# Altium PCB SubSystems Development Board.PcbDoc
Units mil, origin at the board's own origin, x right, y up, seen from the top; angles counter-clockwise.
Board outline 3937.01 x 3937.01 mil, 4 copper layers (Component Side, Ground Plane, Power Plane, Solder Side), stack 60.234 mil thick; 106 components, 86 nets, 399 pads, 249 vias.
Unrouted connection lines stored in the file: 5.
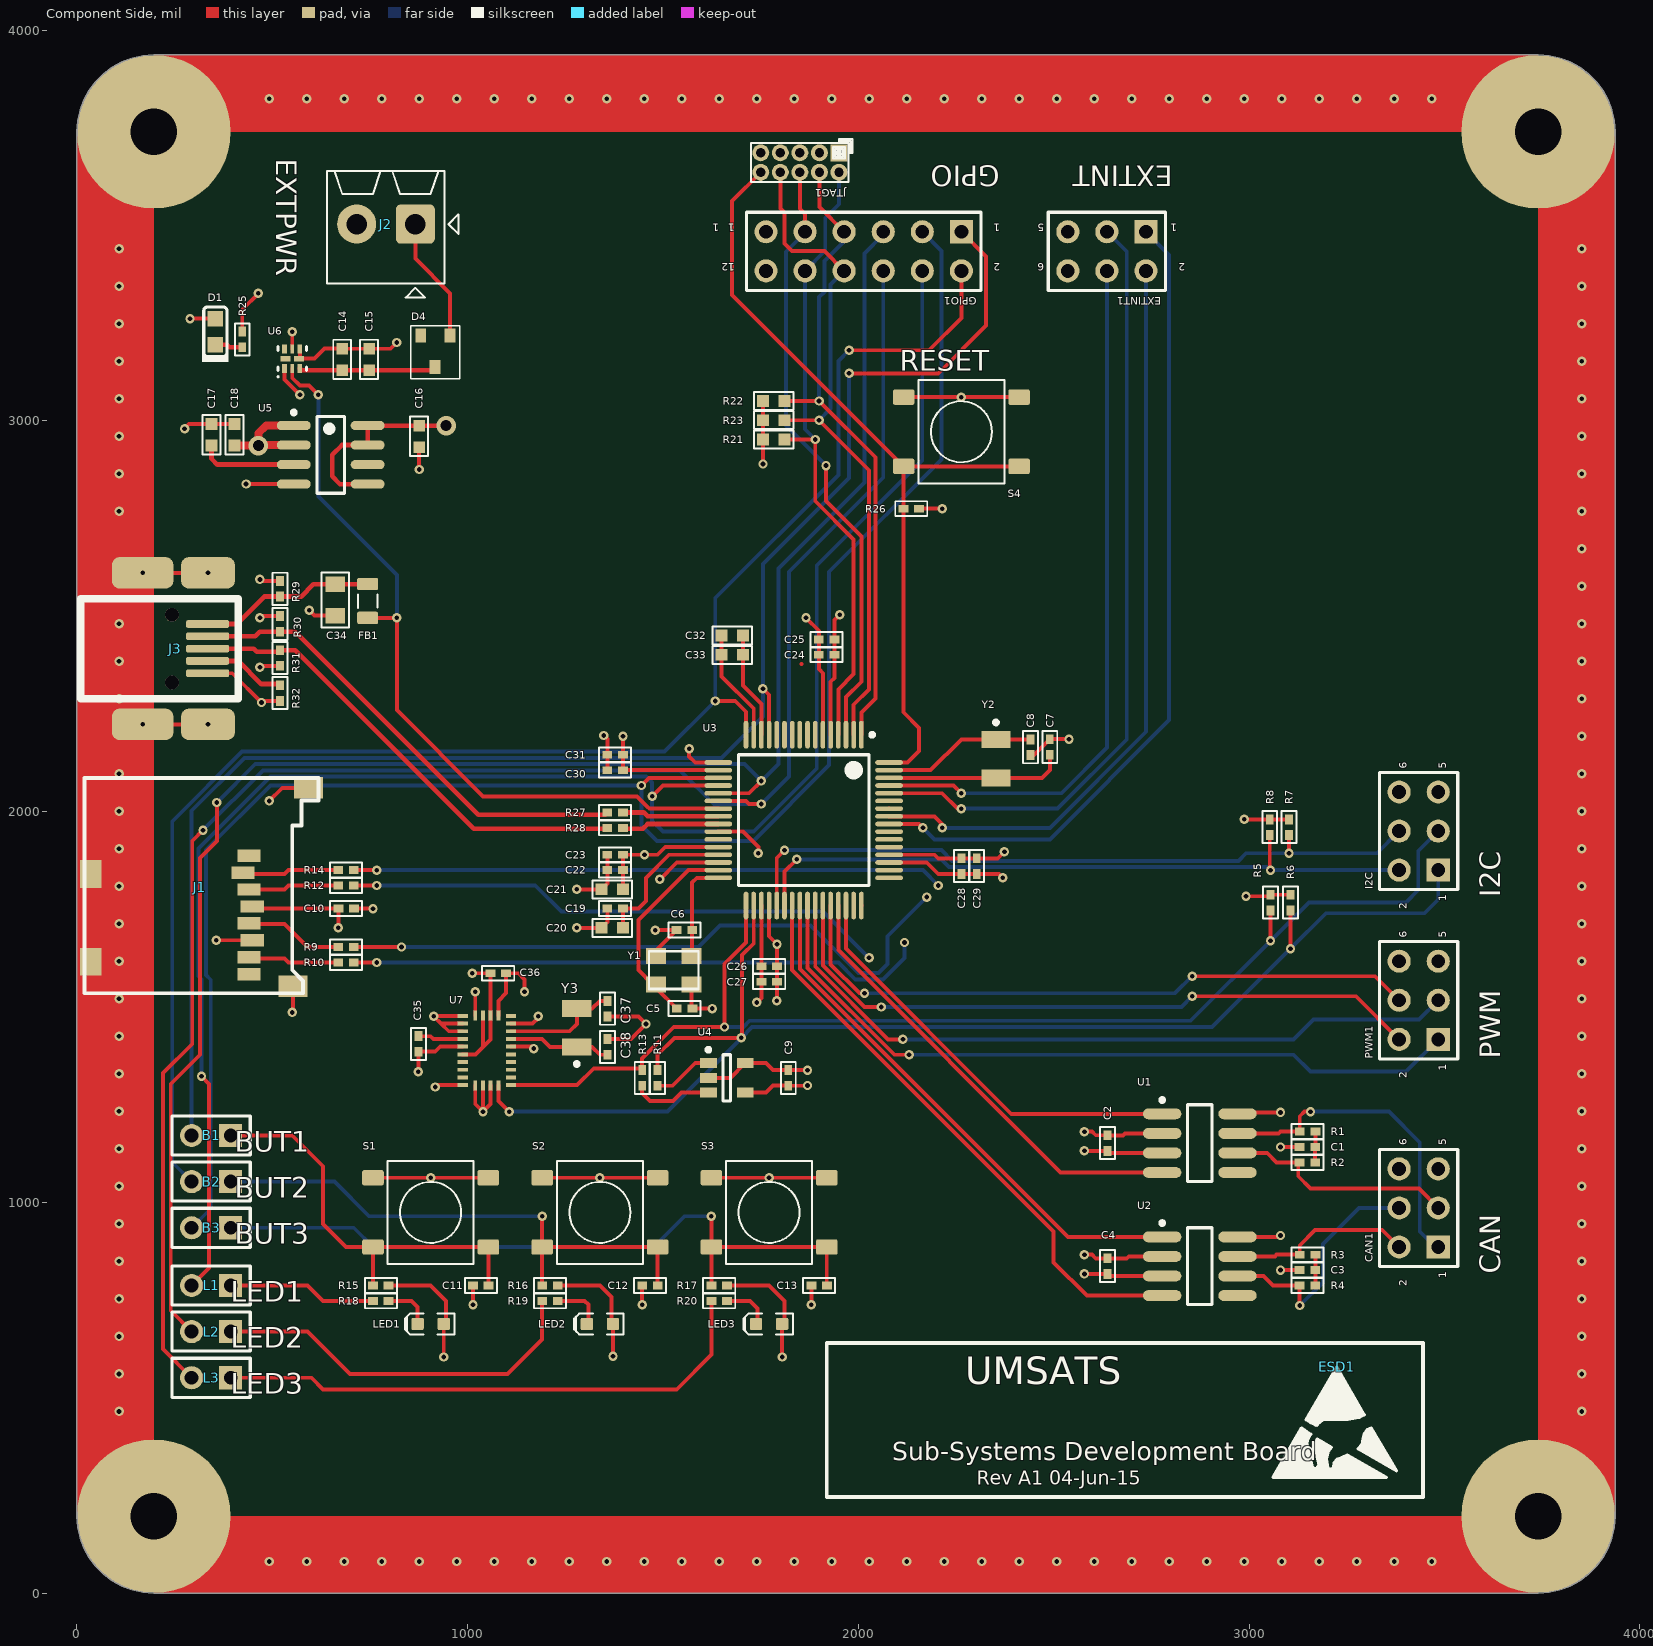
[diagram p0: Component Side view]
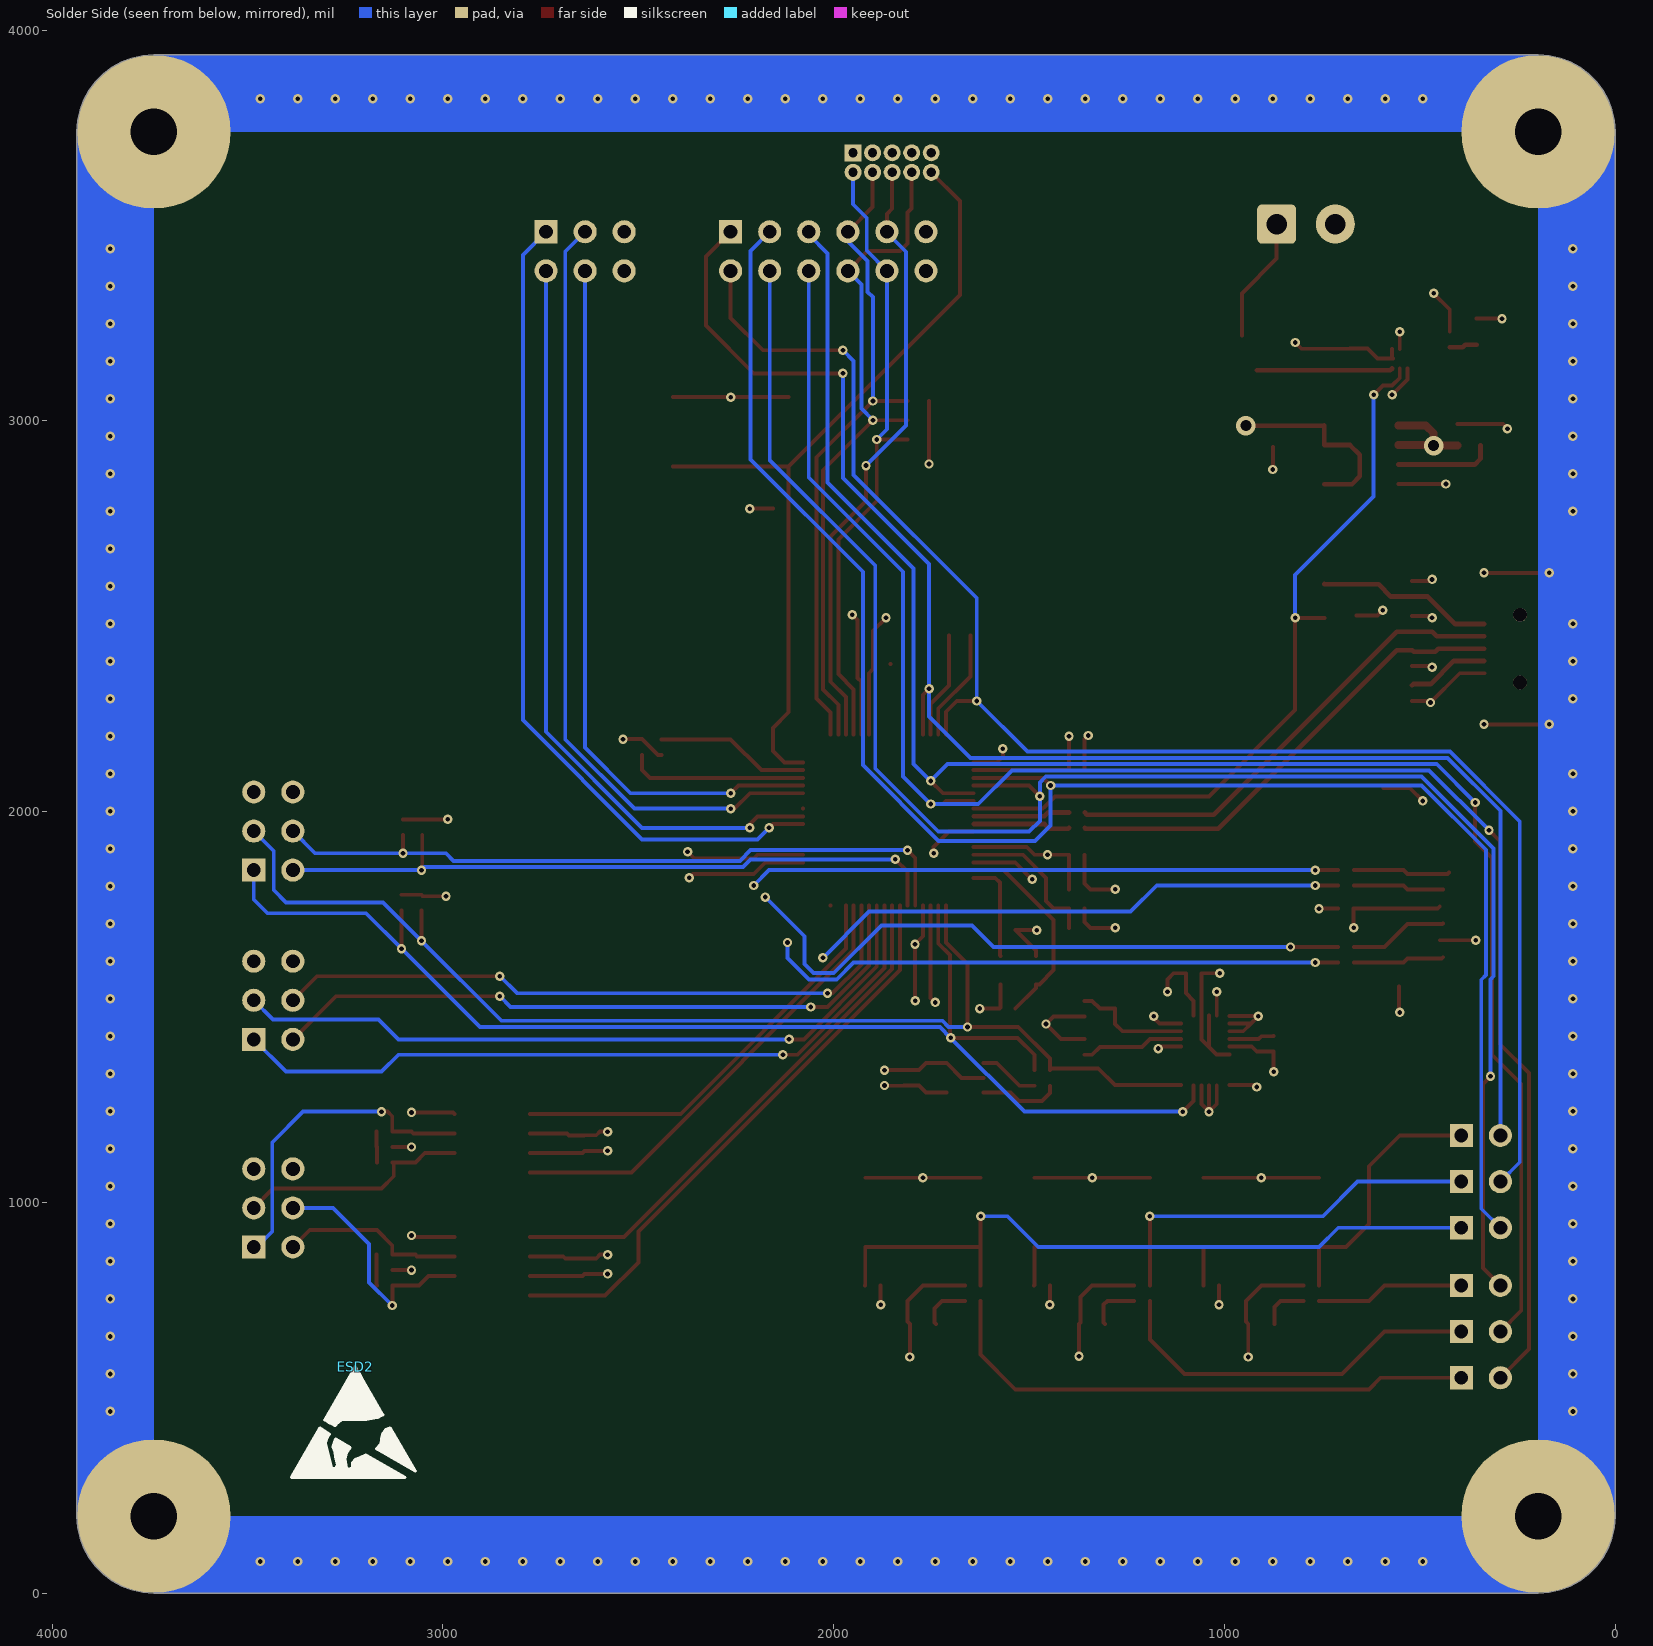
[diagram p1: Solder Side view, seen from below]
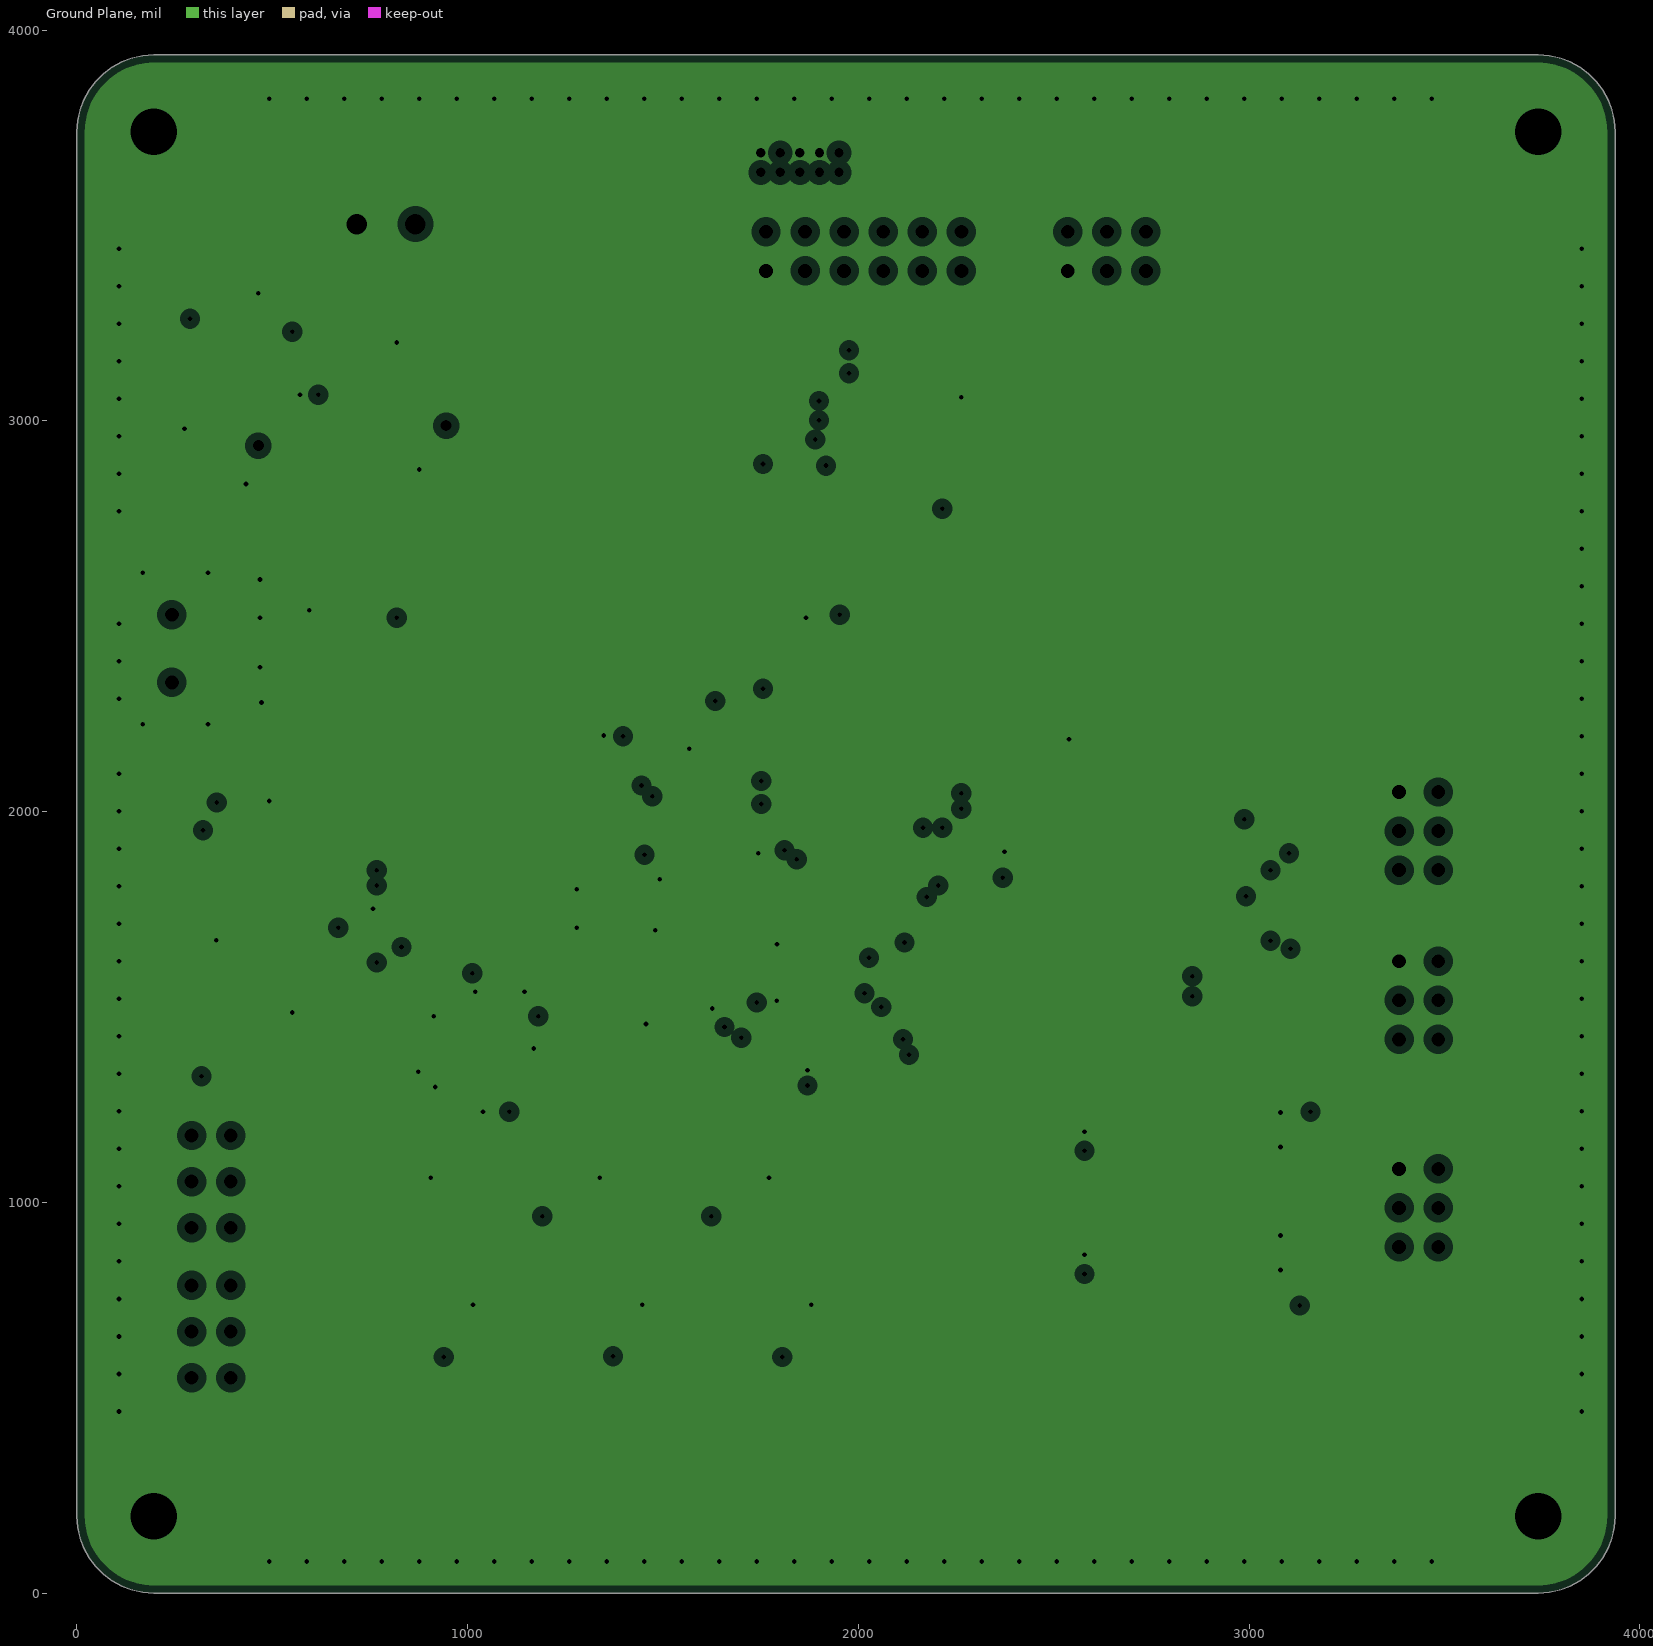
[diagram p2: Ground Plane, clearances drawn from the general rule]
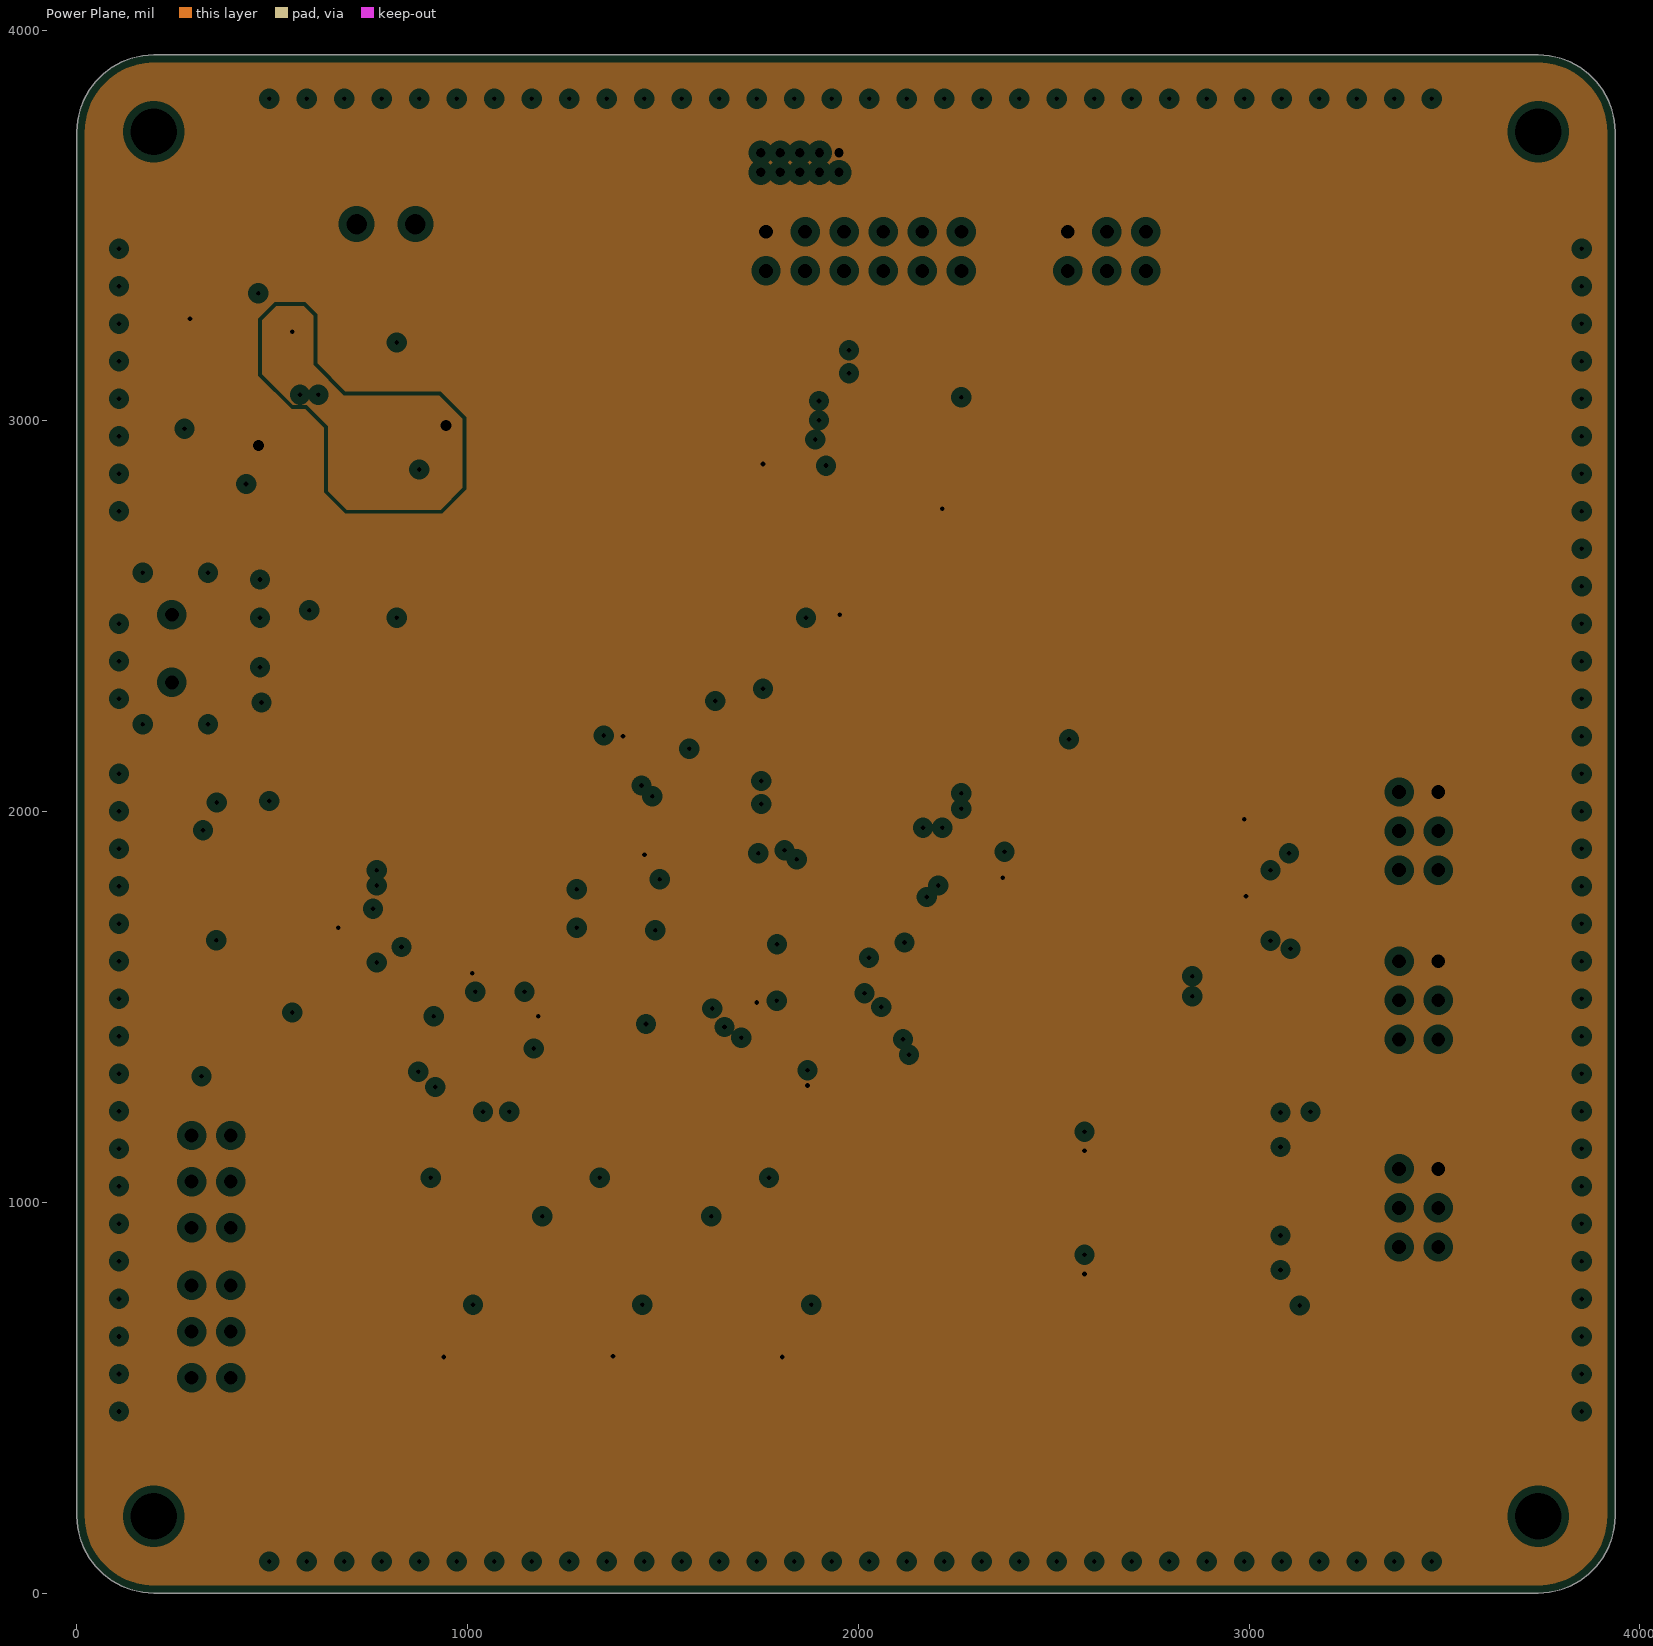
[diagram p3: Power Plane, clearances drawn from the general rule]

## Layer stack, top to bottom
Top Solder: solder mask 0.4, Solder Resist, Dk 3.5
Component Side: signal copper 1.4
Dielectric 1: core 12.6, FR-4, Dk 4.8
Ground Plane: plane copper 1.417, net GND
Dielectric 3: prepreg 32, Dk 4.2
Power Plane: plane copper 1.417, net VMAIN
Dielectric 4: core 10, Dk 4.2
Solder Side: signal copper 1.4
Bottom Solder: solder mask 0.4, Solder Resist, Dk 3.5

## Board outline
196.85,0 3740.16,0 3768.17,2 3795.62,7.97 3821.93,17.79 3846.58,31.25 3869.07,48.08 3888.93,67.94 3905.76,90.42 3919.22,115.08 3929.03,141.39 3935,168.84 3937.01,196.85 3937.01,3740.16 3935,3768.17 3929.03,3795.62 3919.22,3821.93 3905.76,3846.58 3888.93,3869.07 3869.07,3888.93 3846.58,3905.76 3821.93,3919.22 3795.62,3929.03 3768.17,3935 3740.16,3937.01 196.85,3937.01 168.84,3935 141.39,3929.03 115.08,3919.22 90.42,3905.76 67.94,3888.93 48.08,3869.07 31.25,3846.58 17.79,3821.93 7.97,3795.62 2,3768.17 0,3740.16 0,196.85 2,168.84 7.97,141.39 17.79,115.08 31.25,90.42 48.08,67.94 67.94,48.08 90.42,31.25 115.08,17.79 141.39,7.97 168.84,2

## Design rules (kind name [scope] priority, off if disabled: settings)
Clearance [All] p1: gap=6 ignorepadtopadclearanceinfootprint=FALSE except(0: Arc-Hole Track-Hole SMDPad-Hole THPad-Hole Via-Hole Fill-Hole Poly-Hole Region-Hole Text-Hole)
ComponentClearance [All] p1 off: gap=4 collisioncheckmode=3 verticalgap=4 showdistances=FALSE
PlaneClearance [All] p1: clearance=20
PlaneConnect [All] p1: planeconnectstyle=Direct reliefexpansion=20 reliefentries=2 reliefconductorwidth=10 reliefairgap=10
PolygonConnect [All] p1: connectstyle=Relief reliefconductorwidth=10 reliefentries=4 polygonreliefangle="90 Angle" airgapwidth=10
RoutingLayers [All] p1: top layer_v5=FALSE bottom layer_v5=FALSE
RoutingVias [All] p1: holewidth=28 width=50 viastyle="Through Hole" minholewidth=28 minwidth=50 maxholewidth=28 maxwidth=50
SolderMaskExpansion [All] p1: expansion=4
Width [All] p1: maxlimit=50 minlimit=6 preferedwidth=10
26 further rules are at their usual default settings.

## Classes and differential pairs
component class USB: C32 C33 C34 FB1 J3 R26 R27 R28 R29 R30 R31 R32 S4
component class Power: C14 C15 C16 C17 C18 C19 C20 C21 C22 C23 C24 C25 C26 C27 C28 C29 C30 C31 D1 D4 J2 R25 U5 U6
component class PINS: CAN1 ESD1 ESD2 EXTINT1 GPIO1 I2C JTAG1 PWM1 R21 R22 R23
component class PERIPHERALS: B1 B2 B3 C9 C10 C11 C12 C13 C35 C36 C37 C38 J1 L1 L2 L3 LED1 LED2 LED3 R9 R10 R11 R12 R13 R14 R15 R16 R17 R18 R19 R20 S1 S2 S3 U4 U7 Y3
component class MCU: R5 R6 R7 R8 U3
component class "MCU Support": C5 C6 C7 C8 Y1 Y2
component class CAN: C1 C2 C3 C4 R1 R2 R3 R4 U1 U2

## Components (designator, comment, footprint, x,y, rotation, side; value= is the part's Value field where it differs from the comment)
B1 "Button 1 EN" HDR1X2 393.7,1171.26 r180 top
B2 "Button 2 EN" HDR1X2 393.7,1053.15 r180 top
B3 "Button 3 EN" HDR1X2 393.7,935.04 r180 top
C1 "Cap Semi" 0402C-TBD 3169.29,1141.73 r180 top
C2 "Cap Semi" 0402C-TBD 2637.8,1131.89 r90 top
C3 "Cap Semi" 0402C-TBD 3169.29,826.77 r180 top
C4 "Cap Semi" 0402C-TBD 2637.8,816.93 r90 top
C5 "Cap Semi" 0402C-TBD 1535.43,1496.06 r0 top
C6 "Cap Semi" 0402C-TBD 1574.8,1696.85 r180 top
C7 "Cap Semi" 0402C-TBD 2490.16,2145.67 r90 top
C8 "Cap Semi" 0402C-TBD 2440.94,2185.04 r270 top
C9 "Cap Semi" 0402C-TBD 1820.87,1338.58 r270 top
C10 "Cap Semi" 0402C-TBD 669.29,1751.97 r0 top
C11 "Cap Semi" 0402C-TBD 1013.78,787.4 r0 top
C12 "Cap Semi" 0402C-TBD 1446.85,787.4 r0 top
C13 "Cap Semi" 0402C-TBD 1879.92,787.4 r0 top
C14 "Cap Semi" 0603C-TBD 679.13,3129.92 r90 top
C15 "Cap Semi" 0603C-TBD 748.03,3129.92 r90 top
C16 "Cap Semi" 0603C-TBD 875.98,2933.07 r90 top
C17 "Cap Semi" 0603C-TBD 344.49,2992.13 r270 top
C18 "Cap Semi" 0603C-TBD 403.54,2992.13 r270 top
C19 "Cap Semi" 0402C-GENERIC 1397.64,1751.97 r180 top
C20 "Cap Semi" 0603C-TBD 1397.64,1702.76 r180 top
C21 "Cap Semi" 0603C-TBD 1397.64,1801.18 r180 top
C22 "Cap Semi" 0402C-GENERIC 1397.64,1850.39 r180 top
C23 "Cap Semi" 0402C-GENERIC 1397.64,1889.76 r180 top
C24 "Cap Semi" 0402C-GENERIC 1938.98,2401.57 r180 top
C25 "Cap Semi" 0402C-GENERIC 1938.98,2440.94 r180 top
C26 "Cap Semi" 0402C-GENERIC 1751.97,1604.33 r0 top
C27 "Cap Semi" 0402C-GENERIC 1751.97,1564.96 r0 top
C28 "Cap Semi" 0402C-GENERIC 2263.78,1840.55 r90 top
C29 "Cap Semi" 0402C-GENERIC 2303.15,1840.55 r90 top
C30 "Cap Semi" 0402C-GENERIC 1397.64,2106.3 r180 top
C31 "Cap Semi" 0402C-GENERIC 1397.64,2145.67 r180 top
C32 "Cap Semi" 0603C-TBD 1704.72,2450.79 r180 top
C33 "Cap Semi" 0603C-TBD 1704.72,2401.57 r180 top
C34 "Cap Semi" 0805C-GENERIC 661.42,2511.81 r90 top
C35 "Cap Semi" 0402C-TBD 874.02,1385.83 r90 top
C36 "Cap Semi" 0402C-TBD 1098.43,1586.61 r180 top
C37 "Cap Semi" 0402C-TBD 1358.27,1515.75 r270 top
C38 "Cap Semi" 0402C-TBD 1358.27,1377.95 r90 top
CAN1 "CAN" HDR2X3 3484.25,885.83 r90 top
D1 "APG1608CGKC/T" KING-LED0603-25-GREEN_V 354.33,3228.35 r90 top
D4 "SCHOTTKY" SOT23-DIODE 954.72,3218.5 r270 top
ESD1 "ESD" ESDSILK 3224.41,578.74 r0 top
ESD2 "ESD" ESDSILK 3224.41,578.74 r180 bottom
EXTINT1 "EXTINT" HDR2X3 2736.22,3484.25 r180 top
FB1 "600R @ 100 MHz" FBC2012N 744.09,2539.37 r270 top
GPIO1 "GPIO" HDR2X6 2263.78,3484.25 r180 top
I2C "I2C" HDR2X3 3484.25,1850.39 r90 top
J1 "693071010811" MICROSD 19.68,1535.43 r270 top
J2 "Stackable ScrewTerm" 2P_PCB_ScrewTerm_90S_3.81MM 866.14,3503.94 r90 top
J3 "67503-1020" MOLX-67503-1020_V 334.65,2480.32 r0 top
JTAG1 "*" PINHEAD_2X05_127 1850.39,3661.42 r270 top
L1 "LED1 EN" HDR1X2 393.7,787.4 r180 top
L2 "LED2 EN" HDR1X2 393.7,669.29 r180 top
L3 "LED3 EN" HDR1X2 393.7,551.18 r180 top
LED1 "LED1" LED-0603-GREEN 905.51,688.98 r180 top
LED2 "LED2" LED-0603-GREEN 1338.58,688.98 r180 top
LED3 "LED3" LED-0603-GREEN 1771.65,688.98 r180 top
PWM1 "PWM" HDR2X3 3484.25,1417.32 r90 top
R1 "Res3" 0402R-TBD 3129.92,1181.1 r0 top
R2 "Res3" 0402R-TBD 3169.29,1102.36 r180 top
R3 "Res3" 0402R-TBD 3129.92,866.14 r0 top
R4 "Res3" 0402R-TBD 3169.29,787.4 r180 top
R5 "Res3" 0402R-TBD 3055.12,1787.4 r270 top
R6 "Res3" 0402R-TBD 3106.3,1787.4 r270 top
R7 "Res3" 0402R-TBD 3102.36,1980.32 r270 top
R8 "Res3" 0402R-TBD 3053.15,1980.32 r270 top
R9 "Res3" 0402R-TBD 708.66,1653.54 r180 top
R10 "Res3" 0402R-TBD 708.66,1614.17 r180 top
R11 "Res3" 0402R-TBD 1486.22,1338.58 r270 top
R12 "Res3" 0402R-TBD 708.66,1811.02 r180 top
R13 "Res3" 0402R-TBD 1446.85,1338.58 r270 top
R14 "Res3" 0402R-TBD 708.66,1850.39 r180 top
R15 "Res3" 0402R-TBD 757.87,787.4 r0 top
R16 "Res3" 0402R-TBD 1190.94,787.4 r0 top
R17 "Res3" 0402R-TBD 1624.02,787.4 r0 top
R18 "Res3" 0402R-TBD 757.87,748.03 r0 top
R19 "Res3" 0402R-TBD 1190.94,748.03 r0 top
R20 "Res3" 0402R-TBD 1624.02,748.03 r0 top
R21 "Res3" 0603R-GENERIC 1811.02,2952.76 r180 top
R22 "Res3" 0603R-GENERIC 1811.02,3051.18 r180 top
R23 "Res3" 0603R-GENERIC 1811.02,3001.97 r180 top
R25 "Res3" 0402R-TBD 423.23,3188.98 r90 top
R26 "Res3" 0402R-TBD 2155.51,2775.59 r180 top
R27 "Res3" 0402R-TBD 1397.64,1998.03 r180 top
R28 "Res3" 0402R-TBD 1397.64,1958.66 r180 top
R29 "Res3" 0402R-GENERIC 519.69,2590.55 r270 top
R30 "Res Varistor" 0402R-GENERIC 519.69,2460.63 r90 top
R31 "Res Varistor" 0402R-GENERIC 519.69,2413.39 r270 top
R32 "Res Varistor" 0402R-GENERIC 519.69,2283.46 r90 top
S1 "TS-1170S-WP" TS-1170S 905.51,974.41 r0 top
S2 "TS-1170S-WP" TS-1170S 1338.58,974.41 r0 top
S3 "TS-1170S-WP" TS-1170S 1771.65,974.41 r0 top
S4 "TS-1170S-WP" TS-1170S 2263.78,2972.44 r0 top
U1 "SN65HVD231QDRG4Q1" D8_M 2874.02,1151.57 r0 top
U2 "SN65HVD231QDRG4Q1" D8_M 2874.02,836.61 r0 top
U3 "AT32UC3C2512C-A2UR" TQFP64_N 1860.24,1978.35 r270 top
U4 "AT24MAC602" ATML-5TS1-5_N 1663.39,1318.9 r0 top
U5 "REG103UA-3.3" TI-D8_N 649.61,2913.39 r0 top
U6 "TPS22933ARSET" RSE8 551.18,3159.45 r90 top
U7 "BNO055" BNO055 1059.06,1299.21 r0 top
Y1 "16MHz" CRYSTAL-3.2-2.5 1527.56,1594.49 r180 top
Y2 "NX3215SA-32.768K-STD-MUS-2" ABRA-ABS07-2_V 2352.36,2135.83 r270 top
Y3 "NX3215SA-32.768K-STD-MUS-2" ABRA-ABS07-2_V 1279.53,1446.85 r90 top

## Footprints (in the part's own frame and the unit in brackets; to place one, negate y for a bottom-side part, rotate by r counter-clockwise, add the part's x,y. Pads: shape width x height; smd on the part's side, far side on the other; paste and mask are expansions set on the pad)
2P_PCB_ScrewTerm_90S_3.81MM [mil] "TERM BLOCK 2POS SIDE ENT STACKABLE 3.81MM"
  rrect25% 100x100 hole 52: 1(0,0)
  round 100 hole 52: 2(0,150)
  silkscreen extent -188,-110 136,226, body extent -152,-75 136,225, height 335
0402C-GENERIC [mil]
  rect 25x20 smd: 1(0,0) 2(40,0)
  silkscreen extent -21,-19 61,19
0402C-TBD [mil]
  rect 25x20 smd: 1(0,0) 2(40,0)
  silkscreen extent -21,-19 61,19, body extent 2,-9 39,9, height 19
0402R-GENERIC [mil]
  rect 25x20 smd: 1(0,0) 2(40,0)
  silkscreen extent -21,-19 61,19, body extent -6,-10 46,10, height 14
0402R-TBD [mil]
  rect 25x20 smd: 1(0,0) 2(40,0)
  silkscreen extent -21,-19 61,19, body extent -6,-10 46,10, height 14
0603C-TBD [mil] "CAPACITOR 0603 TBD"
  rect 30x30 smd: 1(0,0) 2(55,0)
  silkscreen extent -23,-23 78,23, body extent -4,-15 59,15, height 19
0603R-GENERIC [mil] "RESISTOR 0603"
  rect 30x30 smd: 1(0,0) 2(55,0)
  silkscreen extent -23,-23 78,23, body extent -4,-15 59,15, height 19
0805C-GENERIC [mil] "CAPACITOR 0805"
  rect 40x50 smd: 1(-10,0) 2(70,0)
  silkscreen extent -40,-35 100,35, body extent -11,-25 70,25, height 26
ABRA-ABS07-2_V [mm] "Hand Drawn, 2-Leads, Body 3.2x1.5mm, Pitch 2.5mm"
  rect 1.1x1.9 smd: 1(-1.25,0) 2(1.25,0)
  silkscreen extent -2.47,-0.12 -2.23,0.13, body extent -1.6,-0.75 1.6,0.75, height 0.9
ATML-5TS1-5_N [mm] "SOT23, 5-Leads, Body 2.9x1.6mm, Pitch 0.95mm, IPC Medium Density"
  rect 1.1x0.65 smd: 1(-1.2,0.95) 2(-1.2,0) 3(-1.2,-0.95) 4(1.2,-0.95) 5(1.2,0.95)
  silkscreen extent -1.32,-1.5 0.25,1.95, body extent -0.8,-1.45 0.8,1.45, height 1
BNO055 [mm] "LGA, 4-Leads, Body 5.20x3.80mmx18.00mm, Pitch 0.50mm"
  rect 0.675x0.25 smd: 1(1.325,4.525) 6(-1.825,4.525) 7(-1.825,4.025) 8(-1.825,3.525) 9(-1.825,3.025) 10(-1.825,2.525) 11(-1.825,2.025) 12(-1.825,1.525) 13(-1.825,1.025) 14(-1.825,0.525) 15(-1.825,0.025) 20(1.325,0.025) 21(1.325,0.525) 22(1.325,1.025) 23(1.325,1.525) 24(1.325,2.025) 25(1.325,2.525) 26(1.325,3.025) 27(1.325,3.525) 28(1.325,4.025)
  rect 0.25x0.675 smd: 2(0.5,4.55) 3(0,4.55) 4(-0.5,4.55) 5(-1,4.55) 16(-1,0) 17(-0.5,0) 18(0,0) 19(0.5,0)
  body extent -2.03,-0.28 1.53,4.84, height 1.8
CRYSTAL-3.2-2.5 [mm]
  rect 1.3x1.05 smd: 1(-1.15,-0.925) 2(1.15,-0.925) 3(1.15,0.925) 4(-1.15,0.925)
  silkscreen extent -1.6,-1.25 1.6,1.25
D8_M [mm] "SOIC, 8-Leads, Body 4.9x3.9mm, Pitch 1.27mm, IPC Low Density"
  oval 2.5x0.7 smd: 1(-2.45,1.905) 2(-2.45,0.635) 3(-2.45,-0.635) 4(-2.45,-1.905) 5(2.45,-1.905) 6(2.45,-0.635) 7(2.45,0.635) 8(2.45,1.905)
  silkscreen extent -2.57,-2.5 0.8,2.93, body extent -2,-2.5 2,2.5, height 1.75
ESDSILK [mil]
  silkscreen extent -164,-283 154,0
FBC2012N [mm] "Ferrite Bead Chip, Body 2.0x1.2mm, 0805, IPC Medium Density"
  round 0.508 on Mech15: 0(0,0)
  rrect25% 0.8x1.35 smd: 1(-1.1,0) 2(1.1,0)
  silkscreen extent -0.43,-0.64 0.46,0.64, body extent -1,-0.62 1,0.63, height 0.9
HDR1X2 [mm] "Connector; Header; 2 Position"
  rect 1.5x1.5 hole 0.9: 1(0,0)
  round 1.5 hole 0.9: 2(2.54,0)
  silkscreen extent -1.27,-1.27 3.81,1.27
HDR2X3 [mm] "Connector; Header; 3x2 Position"
  rect 1.5x1.5 hole 0.9: 1(0,0)
  round 1.5 hole 0.9: 2(0,2.54) 3(2.54,0) 4(2.54,2.54) 5(5.08,0) 6(5.08,2.54)
  silkscreen extent -1.27,-1.27 6.35,3.81
HDR2X6 [mm] "Connector; Header; 6x2 Position"
  rect 1.5x1.5 hole 0.9: 1(0,0)
  round 1.5 hole 0.9: 2(0,2.54) 3(2.54,0) 4(2.54,2.54) 5(5.08,0) 6(5.08,2.54) 7(7.62,0) 8(7.62,2.54) 9(10.16,0) 10(10.16,2.54) 11(12.7,0) 12(12.7,2.54)
  silkscreen extent -1.27,-1.27 13.97,3.81
KING-LED0603-25-GREEN_V [mm] "LED, SMT, Body 1.6 x 0.8 mm, 0.25mm Thickness"
  rect 1x1 smd paste+0 mask+0: 1(0.85,0) 2(-0.85,0)
  silkscreen extent -1.97,-0.85 1.6,0.85, body extent -0.8,-0.4 0.8,0.4, height 0.25
LED-0603-GREEN [mm]
  round 0.254 on Mech15: 0(0,0)
  rrect25% 0.8x0.8 smd: A(-0.85,0) K(0.85,0)
  Component Side pour cut-out: -0.5,0.5 0.5,0.5 0.5,-0.5 -0.5,-0.5
  silkscreen extent -1.55,-0.67 1.68,0.67, body extent -0.8,-0.4 0.8,0.4, height 0.75
MICROSD [mm]
  rect 0.8x1.5 smd: 1(-8.94,10.7) 2(-7.84,10.3) 3(-6.74,10.7) 4(-5.64,10.9) 5(-4.54,10.7) 6(-3.44,10.9) 7(-2.34,10.7) 8(-1.24,10.7)
  rect 1.4x1.9 smd: 9(-13.35,14.55) 9(-0.45,13.55)
  rect 1.8x1.4 smd: 10(-7.75,0.4) 10(-2.05,0.4)
  silkscreen extent -14,0 0,15.2
MOLX-67503-1020_V [mm] "Mini USB Connector, SMT, Righer Angle"
  rrect50% 2.8x0.5 smd: 1(0,0) 2(0,-0.8) 3(0,-1.6) 4(0,-2.4) 5(0,-3.2)
  rrect50% 3.5x2.05 smd: 6(0.025,3.325) 8(0.025,-6.525)
  rrect50% 4x2.05 smd: 7(-4.225,3.325) 9(-4.225,-6.525)
  round 0.9 hole 0.9 unplated: X(-2.325,-3.8) Y(-2.325,0.6)
  silkscreen extent -8.25,-4.85 2,1.65, body extent -8.22,-6.56 0.78,3.34, height 3.95
PINHEAD_2X05_127 [mm]
  rect 1.108x1.108 hole 0.6: 1(-0.635,2.54)
  round 1.108 hole 0.6: 2(0.635,2.54) 3(-0.635,1.27) 4(0.635,1.27) 5(-0.635,0) 6(0.635,0) 7(-0.635,-1.27) 8(0.635,-1.27) 9(-0.635,-2.54) 10(0.635,-2.54)
  silkscreen extent -1.52,-3.18 1.27,3.43
RSE8 [mm] "QFN, 8-Leads, Body 1.5x1.5mm, Pitch 0.5mm, TI Recommended"
  rect 0.58x0.3 smd paste-0.025 mask+0.05: 1(-0.64,0.5) 3(-0.64,-0.5) 5(0.64,-0.5) 7(0.64,0.5)
  rect 0.58x0.25 smd paste-0.125 mask+0.05: 2(-0.64,0) 6(0.64,0)
  rect 0.35x0.63 smd paste-0.025 mask+0.05: 4(0,-0.435) 8(0,0.435)
  silkscreen extent -1.22,-0.92 0.77,0.97, body extent -0.77,-0.77 0.77,0.77, height 0.6
SOT23-DIODE [mm] "SOT23 WITH A/K PIN NUMBERS"
  rect 0.9x0.7 smd: A(0,0) K(2.032,-0.965) NC(0,-1.9)
  silkscreen extent -0.63,-2.54 2.8,0.64, body extent -0.1,-2.41 2.34,0.51, height 1.33
TI-D8_N [mm] "SOIC, 8-Leads, Body 4.9x3.9mm, Pitch 1.27mm, IPC Medium Density"
  oval 2.2x0.6 smd: 1(-2.4,1.905) 2(-2.4,0.635) 3(-2.4,-0.635) 4(-2.4,-1.905) 5(2.4,-1.905) 6(2.4,-0.635) 7(2.4,0.635) 8(2.4,1.905)
  silkscreen extent -2.52,-2.5 0.9,2.88, body extent -2,-2.5 2,2.5, height 1.75
TQFP64_N [mm] "Thin QFP, 64-Leads, Body 10x10mm, Pitch 0.5mm, IPC Medium Density"
  oval 1.8x0.3 smd: 1(-5.55,3.75) 2(-5.55,3.25) 3(-5.55,2.75) 4(-5.55,2.25) 5(-5.55,1.75) 6(-5.55,1.25) 7(-5.55,0.75) 8(-5.55,0.25) 9(-5.55,-0.25) 10(-5.55,-0.75) 11(-5.55,-1.25) 12(-5.55,-1.75) 13(-5.55,-2.25) 14(-5.55,-2.75) 15(-5.55,-3.25) 16(-5.55,-3.75) 33(5.55,-3.75) 34(5.55,-3.25) 35(5.55,-2.75) 36(5.55,-2.25) 37(5.55,-1.75) 38(5.55,-1.25) 39(5.55,-0.75) 40(5.55,-0.25) 41(5.55,0.25) 42(5.55,0.75) 43(5.55,1.25) 44(5.55,1.75) 45(5.55,2.25) 46(5.55,2.75) 47(5.55,3.25) 48(5.55,3.75)
  oval 0.3x1.8 smd: 17(-3.75,-5.55) 18(-3.25,-5.55) 19(-2.75,-5.55) 20(-2.25,-5.55) 21(-1.75,-5.55) 22(-1.25,-5.55) 23(-0.75,-5.55) 24(-0.25,-5.55) 25(0.25,-5.55) 26(0.75,-5.55) 27(1.25,-5.55) 28(1.75,-5.55) 29(2.25,-5.55) 30(2.75,-5.55) 31(3.25,-5.55) 32(3.75,-5.55) 49(3.75,5.55) 50(3.25,5.55) 51(2.75,5.55) 52(2.25,5.55) 53(1.75,5.55) 54(1.25,5.55) 55(0.75,5.55) 56(0.25,5.55) 57(-0.25,5.55) 58(-0.75,5.55) 59(-1.25,5.55) 60(-1.75,5.55) 61(-2.25,5.55) 62(-2.75,5.55) 63(-3.25,5.55) 64(-3.75,5.55)
  silkscreen extent -5.67,-4.25 4.25,4.58, body extent -5,-5 5,5, height 1.6
TS-1170S [mm] "6.5x6.5mm SMD tact switch 7.0mm stem"
  round 0.508 on Mech15: 0(0,0)
  rrect25% 1.4x1 smd: 1(-3.75,2.25) 1(3.75,2.25) 2(-3.75,-2.25) 2(3.75,-2.25)
  silkscreen extent -2.79,-3.35 2.79,3.35, body extent -4,-3.25 4,3.25, height 7

## Part data
B1 B2 B3 L1 L2 L3: library part "Header 2", "Header, 2-Pin"
C1 C2 C3 C4 C5 C6 C7 C8 C9 C10 C11 C12 C13 C14 C15 C16 C17 C18 C19 C20 C21 C22 C23 C24 C25 C26 C27 C28 C29 C30 C31 C32 C33 C34 C35 C36 C37 C38: "Capacitor (Semiconductor SIM Model)"
CAN1 EXTINT1 I2C PWM1: library part "Header 3X2", "Header, 3-Pin, Dual row"
D1: library part CMP-0239-00001-1, "LED, SMT, 0603(1608), 0.25mm Thickness, Green"
D4: library part DIODE-SCHOTTKY-GENERIC, "GENERIC SCHOTTKY DIODE"
ESD1 ESD2: "ESD LOGO"
FB1: library part FERRITE_WURTH_742792042, "Ferrite bead Wurth 742792042 SMD 200mA 0805"
GPIO1: library part "Header 6X2", "Header, 6-Pin, Dual row"
J1: library part MICROSD, "CONN MICRO SD 8 POS SMD"
J2: library part 2P_ScrewTerm_90S_3.81MM, "Terminal Block Screw Type THT 2-Position 3.81mm pitch"
J3: library part CMP-0411-00002-1, "USB, MINI, SMD, RA KME04-USBMU03A01"
JTAG1: library part PINHEAD_PINHD-2X5PASSO127
LED1 LED2 LED3: library part LED_SMD_Green_0603_570nm, "LED 0603 SMD Green 570nm 50mcd 20mA"
R1 R2 R3 R4 R5 R6 R7 R8 R9 R10 R11 R12 R13 R14 R15 R16 R17 R18 R19 R20 R21 R22 R23 R25 R26 R27 R28 R29: "Resistor"
R30 R31 R32: "Varistor (Voltage-Sensitive Resistor)"
S1 S2 S3 S4: library part SW_SMD_PB_7.0mm, "Switch SMD Tact 7.0mm Stem"
U1 U2: library part CMP-0315-00034-1, "Automotive Catalog CAN Transceiver, 17 mA, 3.3 V, -40 to 125 degC, 8-pin SOIC (D), Green (RoHS & no Sb/Br)"
U3: library part CMP-0092-00216-1, "32-bit AVR UC3 C Series Microcontroller, 512KB Flash, 68KB SRAM, 45 GPIO pins, Industrial Grade, 64- Pin TQFP, Reel"
U4: library part CMP-0152-00057-1, "1Kbit (128 x 8), 2-wire Bus Serial EEPROM with Write Protect, 1.7 to 5.5 V, -40 to 85 degC, SOT23-5, RoHS, Tape and Reel"
U5: library part CMP-0395-00170-1, "Single Output Fast Transient Response LDO, 500 mA, Fixed 3.3 V Output, 2.1 to 15 V Input, 8-pin SOIC (D), -40 to 85 degC, Green (RoHS & no Sb/Br)"
U6: library part CMP-0339-00002-1, "Small, Triple-Input Power Multiplexer with Auto-Select and Low Drop-out Voltage Regulator, 2.5 to 12 V, -40 to 85 degC, 8-pin UQFN (RSE), Green (RoHS & no Sb/Br)"
Y1: library part CRYSTAL-3.2-2.5
Y2 Y3: library part CMP-0447-00001-2, "Crystal, 32.768 kHz, 12.5 pF, -40 to 85 degC, SMD Low Profile 3.2 x 1.5 x 0.9 mm, Tape and Reel"

## Free pads (board coordinates)
  round 393.7 hole 118.11: 1(196.85,3740.16) 1(196.85,196.85) 1(3740.16,196.85) 1(3740.16,3740.16)

## Via types
v1: diameter 24, hole 12, Component Side to Solder Side, 247 vias
v2: diameter 50, hole 28, Component Side to Solder Side, 2 vias

## Nets (pads, with @x,y where several pads share a name; then routed paths per layer and width w, separated by ;. In a path a pad name is that pad's centre, name@x,y a point inside that pad or via, vN(x,y) a via of type N, cw(c..) or ccw(c..) an arc to the next point about the centre after c; other vN are vias at no path point)
3V3: C2.1 C4.1 C9.2 C10.1 C18.2 C21.1 C22.1 C23.1 C24.1 C25.1 C26.1 C27.1 C28.1 C29.1 C30.1 C31.1 C36.2 CAN1.5 D1.1 EXTINT1.5 GPIO1.11 I2C.5 J1.4 JTAG1.1 LED1.A LED2.A LED3.A PWM1.5 R5.1 R6.1 R7.1 R8.1 R15.2 R16.2 R17.2 R21.2 R22.2 R23.2 R26.1 U1.3 U2.3 U3.5 U3.18 U3.28 U3.35 U3.51 U4.4 U5.1 U5.2 U7.3 U7.4 U7.11 U7.28 | length 4587.2
  Component Side w10: v1(289.37,3261.81) D1.1 ; C18.2 C18.2@404.8,2938.39 ; J1.4 454.33,1751.97 C10.1 v1(669.29,1702.76) ; R15.2 905.51,787.4 944.88,748.03 944.88,694.88 LED1.A v1(938.98,604.33) ; U7.11 1020.67,1378.94 1039.37,1397.64 ; v1(1011.81,1586.61) C36.2 1059.06,1585.98 U7.3 1059.06,1417.32 1039.37,1397.64 ; U7.4 1039.37,1397.64 ; U7.28 1166.34,1457.68 1181.1,1472.44 v1(1181.1,1476.38) ; R16.2 1338.58,787.4 1368.11,757.87 1368.11,692.91 LED2.A v1(1372.05,606.3) ; C21.1 C22.1 C23.1 1486.22,1889.76 1505.91,1909.45 U3.28 ; v1(1397.64,2192.91) C31.1 C30.1 U3.18 ; R17.2 1771.65,787.4 1811.02,748.03 1811.02,694.88 LED3.A v1(1805.12,604.33) v1@1801.18,600.39 ; U4.4 1763.78,1281.5 1781.5,1299.21 1820.24,1299.21 C9.2 1869.45,1298.58 v1(1870.08,1299.21) ; v1(1740.16,1511.81) 1751.97,1523.62 C27.1 C26.1 U3.35 ; v1@1755.91,2889.76 v1(1756.02,2889.88) R21.2 R23.2 R22.2 ; U3.5 1929.13,2332.68 1938.98,2342.52 C24.1 C25.1 1938.98,2490.16 v1(1952.76,2503.94) ; U3.51 2175.2,1870.08 2204.72,1840.55 C28.1 C29.1 2360.24,1840.55 v1@2374.02,1826.77 ; R26.1 v1(2214.57,2775.59) ; v1(2578.74,816.93) C4.1 2643.11,811.61 U2.3 ; v1(2578.74,1131.89) C2.1 2643.11,1126.57 U1.3 ; v1(2988.19,1980.32) R8.1 R7.1 ; v1(2992.13,1783.46) 3051.18,1783.46 R5.1 R6.1
  Component Side w20: C18.2 403.66,2937.01 v2(464.57,2937.01) ; U5.2 465.94,2938.39 v2(464.57,2937.01) ; U5.1 484.45,2988.39 464.57,2968.5 v2(464.57,2937.01)
  other v1: 2370.08,1830.71 1452.76,1889.76
ADC1: U3.7 | length 0
ADC2: U3.8
ADC3: U3.9
ADC4: U3.10
ADC5: U3.11
ADC6: U3.12
BUTTON1: B1.1 C11.2 R15.1 S1.2 | length 1061.3
  Component Side w10: B1.1 551.18,1171.26 629.92,1092.52 629.92,944.88 688.98,885.83 S1.2@757.87,885.83 ; R15.1 S1.2@757.87,885.83 ; C11.2 1053.15,788.03 1053.15,885.83 S1.2@757.87,885.83
BUTTON2: B2.1 C12.2 R16.1 S2.2 | length 1405.1
  Component Side w10: R16.1 S2.2@1190.94,885.83 ; v1(1190.94,964.57) S2.2@1190.94,885.83 ; C12.2 1486.22,788.03 1486.22,885.83 S2.2@1190.94,885.83
  Solder Side w10: B2.1 659.45,1053.15 748.03,964.57 v1(1190.94,964.57)
BUTTON3: B3.1 C13.2 R17.1 S3.2 | length 1854.4
  Component Side w10: R17.1 S3.2@1624.02,885.83 ; v1(1624.02,964.57) S3.2@1624.02,885.83 ; C13.2 1919.29,788.03 1919.29,885.83 S3.2@1624.02,885.83
  Solder Side w10: B3.1 708.66,935.04 757.87,885.83 1476.38,885.83 1555.12,964.57 v1(1624.02,964.57)
BXIN32: C37.1 U7.27 Y3.2 | length 302.3
  Component Side w10: U7.27 1260.83,1437.99 1279.53,1456.69 Y3.2 1318.9,1496.06 1338.58,1515.75 C37.1
BXOUT32: C38.1 U7.26 Y3.1 | length 263.8
  Component Side w10: U7.26 1189.96,1418.31 1210.63,1397.64 Y3.1 1318.9,1397.64 1338.58,1377.95 C38.1
EXTINT1: EXTINT1.1 U3.56 | length 2133.7
  Component Side w10: U3.56 2155.51,1968.5 v1(2165.35,1958.66)
  Solder Side w10: v1(2165.35,1958.66) 2194.88,1929.13 2490.16,1929.13 2795.28,2234.25 2795.28,3425.2 EXTINT1.1
EXTINT2: EXTINT1.2 U3.57 | length 1956.9
  Component Side w10: U3.57 2194.88,1988.19 2214.57,1968.5 v1(2214.57,1958.66)
  Solder Side w10: v1(2214.57,1958.66) 2490.16,1958.66 2736.22,2204.72 EXTINT1.2
EXTINT3: EXTINT1.3 U3.60 | length 2018.2
  Component Side w10: U3.60 2214.57,2047.24 2253.94,2007.87 v1(2263.78,2007.87)
  Solder Side w10: v1(2263.78,2007.87) 2509.84,2007.87 2687.01,2185.04 2687.01,3433.46 EXTINT1.3
EXTINT4: EXTINT1.4 U3.61 | length 1834.4
  Component Side w10: U3.61 2244.09,2066.93 v1(2263.78,2047.24)
  Solder Side w10: v1(2263.78,2047.24) 2519.69,2047.24 2636.22,2163.78 EXTINT1.4
GND: C1.2 C2.2 C3.2 C4.2 C5.2 C6.2 C7.2 C8.2 C9.1 C10.2 C11.1 C12.1 C13.1 C14.2 C15.2 C16.1 C17.1 C18.1 C19.2 C20.2 C21.2 C22.2 C23.2 C24.2 C25.2 C26.2 C27.2 C28.2 C29.2 C30.2 C31.2 C34.1 C35.1 C36.1 C37.2 C38.2 CAN1.6 EXTINT1.6 GPIO1.12 I2C.6 J1.6 J1.9 J1.10 J2.2 J3.5 J3.6 J3.7 J3.8 J3.9 JTAG1.3 JTAG1.5 JTAG1.9 pad.1 PWM1.6 R25.2 R29.1 R30.2 R31.2 R32.1 S1.1 S2.1 S3.1 S4.1 U1.2 U1.8 U2.2 U2.8 U3.6 U3.17 U3.26 U3.30 U3.36 U3.52 U4.2 U4.5 U5.4 U6.1 U6.4 U6.5 U7.2 U7.5 U7.6 U7.7 U7.8 U7.10 U7.15 U7.16 U7.17 U7.18 U7.25 Y1.2 Y1.4 | length 7488.4
  Component Side w10: v1(168.31,2223.42) v1(335.63,2223.42) ; v1(168.31,2611.22) v1(335.63,2611.22) ; v1(275.59,2980.32) 287.4,2992.13 C17.1 C18.1 ; J3.5 397.64,2354.33 v1(472.44,2279.53) 476.38,2283.46 R32.1 ; v1(356.69,1670.87) J1.6 ; R25.2 423.23,3285.43 v1(464.57,3326.77) ; v1(433.07,2838.58) 433.27,2838.39 U5.4 ; v1(468.5,2370.08) 471.81,2373.39 R31.2 ; v1(468.5,2496.06) 473.07,2500.63 R30.2 ; v1(468.5,2594.49) 472.44,2590.55 R29.1 ; v1(492.13,2027.56) 525.59,2061.02 J1.9@592.52,2061.02 ; U6.1 531.5,3106.3 v1(570.87,3066.93) ; v1(551.18,1486.22) 553.15,1488.19 J1.9@553.15,1553.15 ; U6.5 570.87,3162.01 U6.4 608.27,3159.45 633.86,3185.04 679.02,3185.04 C14.2 C15.2 803.03,3184.92 v1(818.9,3200.79) ; v1(594.49,2515.75) 608.43,2501.81 C34.1 ; C10.2 v1(757.87,1751.97) ; S1.1@757.87,1062.99 v1(905.51,1062.99) S1.1@1053.15,1062.99 ; v1(874.02,1334.65) C35.1 917.32,1385.83 930.12,1398.62 U7.10 ; v1(875.98,2875.98) C16.1 ; v1(917.32,1295.28) 922.24,1300.2 U7.15 ; U7.8 951.77,1437.99 932.09,1457.68 ; U7.7 932.09,1457.68 ; U7.6 914.37,1477.36 v1(913.39,1476.38) 932.09,1457.68 ; v1(1013.78,738.19) C11.1 ; U7.16 1019.69,1251.97 v1(1039.37,1232.28) ; U7.5 v1(1019.69,1539.37) ; U7.17 v1(1039.37,1232.28) ; U7.18 1059.06,1251.97 v1(1039.37,1232.28) ; U7.2 1078.74,1515.75 1098.43,1535.43 C36.1 1129.92,1586.61 1145.67,1570.87 v1(1145.67,1539.37) ; U7.25 1164.37,1398.62 v1(1169.29,1393.7) ; S2.1@1190.94,1062.99 S2.1@1486.22,1062.99 ; v1(1279.53,1702.76) C20.2 1357.64,1717.76 C19.2 ; v1(1279.53,1801.18) C21.2 1357.64,1816.18 C22.2 C23.2 ; v1(1348.43,2194.88) 1357.64,2185.67 C31.2 C30.2 ; C38.2 1417.95,1417.95 v1(1456.69,1456.69) 1437.64,1475.75 C37.2 ; v1(1446.85,738.19) C12.1 ; v1(1480.31,1696.85) C6.2 1482.28,1644.33 Y1.2 ; v1(1492.13,1826.77) 1535.43,1870.08 U3.30 ; v1(1566.93,2161.42) 1566.93,2141.73 1582.68,2125.98 U3.17 ; Y1.4 1572.84,1498.66 C5.2 v1(1625.98,1496.06) ; U4.2 1673.23,1318.9 U4.5 1763.78,1356.3 1781.5,1338.58 C9.1 v1(1870.08,1338.58) ; S3.1@1624.02,1062.99 v1(1771.65,1062.99) S3.1@1919.29,1062.99 ; U3.26 1704.72,1948.82 1744.09,1909.45 v1(1744.09,1893.7) ; U3.36 1771.65,1681.1 v1(1791.97,1660.79) C26.2 C27.2 1791.97,1516.38 v1(1791.34,1515.75) ; v1(1866.14,2496.06) 1898.98,2463.23 C25.2 C24.2 1898.98,2364.8 1909.45,2354.33 U3.6 ; v1(1879.92,738.19) C13.1 ; U3.52 2194.88,1889.76 2204.72,1879.92 2263.15,1879.92 C28.2 C29.2 2356.93,1880.55 v1(2374.02,1897.64) ; S4.1@2116.14,3061.02 S4.1@2411.42,3061.02 ; C8.2 2449.53,2145.04 C7.2 2538.74,2185.67 v1(2539.37,2185.04) ; v1(2578.74,866.14) 2598.43,866.14 2607.64,856.93 C4.2 2638.43,856.3 2687.01,856.3 2692.32,861.61 U2.2 ; v1(2578.74,1181.1) 2598.43,1181.1 2607.64,1171.89 C2.2 2638.43,1171.26 2677.17,1171.26 2682.48,1176.57 U1.2 ; U2.8 3076.97,911.61 v1(3080.71,915.35) ; U1.8 2974.21,1230.32 v1(3080.71,1230.32) ; v1(3080.71,826.77) C3.2 ; v1(3080.71,1141.73) C1.2
  other v1: 492,81 588,81 684,81 780,81 876,81 972,81 1068,81 1164,81 1260,81 1356,81 1452,81 1548,81 1644,81 1740,81 1836,81 1932,81 2028,81 2124,81 2220,81 2316,81 2412,81 2508,81 2604,81 2700,81 2796,81 2892,81 2988,81 3084,81 3180,81 3276,81 3372,81 3468,81 108,465 3852,465 108,561 3852,561 108,657 3852,657 108,753 3852,753 108,849 3852,849 108,945 3852,945 108,1041 3852,1041 1338.58,1062.99 108,1137 3852,1137 108,1233 3852,1233 108,1329 3852,1329 108,1425 3852,1425 108,1521 3852,1521 108,1617 3852,1617 108,1713 3852,1713 108,1809 3852,1809 108,1905 3852,1905 108,2001 3852,2001 108,2097 3852,2097 3852,2193 108,2289 3852,2289 108,2385 3852,2385 108,2481 3852,2481 3852,2577 3852,2673 108,2769 3852,2769 108,2865 3852,2865 108,2961 3852,2961 108,3057 3852,3057 2263.78,3061.02 108,3153 3852,3153 108,3249 3852,3249 108,3345 3852,3345 108,3441 3852,3441 492,3825 588,3825 684,3825 780,3825 876,3825 972,3825 1068,3825 1164,3825 1260,3825 1356,3825 1452,3825 1548,3825 1644,3825 1740,3825 1836,3825 1932,3825 2028,3825 2124,3825 2220,3825 2316,3825 2412,3825 2508,3825 2604,3825 2700,3825 2796,3825 2892,3825 2988,3825 3084,3825 3180,3825 3276,3825 3372,3825 3468,3825
GPIO1: B1.2 GPIO1.1 U3.13 | length 4154.5
  Component Side w10: v1(1755.91,2314.96) 1771.65,2299.21 U3.13 ; v1(1976.38,3122.05) 2204.72,3122.05 2326.77,3244.09 2326.77,3421.26 GPIO1.1
  Solder Side w10: B1.2 293.7,2002.36 429.27,2137.93 1649.74,2137.93 1755.91,2244.09 v1(1755.91,2314.96) 1755.91,2633.86 1976.38,2854.33 v1(1976.38,3122.05)
GPIO2: B2.2 GPIO1.2 U3.16 | length 4091
  Component Side w10: v1(1633.86,2283.46) 1685.04,2283.46 1712.6,2255.91 U3.16 ; v1(1976.38,3181.1) 2181.1,3181.1 2263.78,3263.78 GPIO1.2
  Solder Side w10: B2.2 244.09,1102.76 244.09,1975.38 422.64,2153.93 1504.32,2153.93 v1(1633.86,2283.46) 1633.86,2547.24 1948.82,2862.2 1948.82,3153.54 v1(1976.38,3181.1)
GPIO3: B3.2 GPIO1.3 U3.19 | length 4563.6
  Component Side w10: v1(1444.88,2066.93) 1464.57,2086.61 U3.19
  Solder Side w10: B3.2 342.52,983.86 342.52,1569.87 330.71,1581.68 330.71,1902.57 495.07,2066.93 v1(1444.88,2066.93) 1444.88,1964.57 1484.25,1925.2 1731.29,1925.2 1925.2,2119.11 1925.2,2614.17 2212.6,2901.57 2212.6,3435.43 GPIO1.3
GPIO4: GPIO1.4 L1.2 U3.20 | length 4556.7
  Component Side w10: L1.2 338.58,832.28 338.58,1303.15 v1(318.9,1322.83) ; v1(1472.44,2039.37) 1500,2066.93 U3.20
  Solder Side w10: v1(318.9,1322.83) 318.9,1570.87 311.02,1578.74 311.02,1905.51 495.44,2089.93 1457.31,2089.93 1472.44,2074.8 v1(1472.44,2039.37) 1472.44,1976.38 1500,1948.82 1732.28,1948.82 1893.7,2110.24 1893.7,2629.92 2163.78,2900 GPIO1.4
GPIO5: GPIO1.5 L2.2 U3.21 | length 4535.7
  Component Side w10: L2.2 240.16,722.83 240.16,1303.15 314.96,1377.95 314.96,1881.89 358.27,1925.2 v1(358.27,2023.62) ; U3.21 1720.47,2047.24 v1(1751.97,2078.74)
  Solder Side w10: v1(358.27,2023.62) 456.57,2121.93 1708.78,2121.93 v1(1751.97,2078.74) 1795.28,2122.05 1795.28,2622.05 2015.75,2842.52 2015.75,3429.13 2063.78,3477.17 GPIO1.5
GPIO6: GPIO1.6 L3.2 U3.22 | length 4609.8
  Component Side w10: L3.2 220.47,624.41 220.47,1330.71 295.28,1405.51 295.28,1925.2 v1(322.83,1952.76) ; U3.22 1712.6,2027.56 1720.47,2019.69 v1(1751.97,2019.69)
  Solder Side w10: v1(322.83,1952.76) 476.01,2105.93 1543.68,2105.93 1629.92,2019.69 v1(1751.97,2019.69) 1822.83,2090.55 1822.83,2614.17 2063.78,2855.12 GPIO1.6
I2C1_SCL: I2C.1 R6.2 R11.1 U3.34 U7.19 | length 3478.7
  Component Side w10: U7.19 1078.74,1259.84 v1(1106.3,1232.28) ; R11.1 1486.22,1377.95 1529.28,1421.01 1702.76,1421.01 1702.76,1632.88 1732.28,1662.41 U3.34 ; v1(3106.3,1649.61) R6.2
  Solder Side w10: v1(1106.3,1232.28) 1511.81,1232.28 v1(1700.79,1421.26) 1728.35,1448.82 2905.51,1448.82 v1(3106.3,1649.61) 3196.85,1740.16 3448.82,1740.16 3484.25,1775.59 I2C.1
I2C1_SDA: I2C.3 R5.2 R13.1 U3.33 U7.20 | length 3133.5
  Component Side w10: U7.20 1280.51,1300.2 1322.83,1342.52 1442.91,1342.52 R13.1 1446.85,1368.11 1527.56,1448.82 v1(1657.48,1448.82) 1657.48,1610.24 1712.6,1665.35 U3.33 ; v1(3055.12,1669.29) R5.2
  Solder Side w10: v1(1657.48,1448.82) 1705.72,1448.82 1721.72,1464.82 2850.65,1464.82 v1(3055.12,1669.29) 3153.54,1767.72 3401.57,1767.72 3433.07,1799.21 3433.07,1899.21 I2C.3
I2C2_SCL: I2C.2 R8.2 U3.38 | length 1775
  Component Side w10: U3.38 1811.02,1846.46 v1(1842.52,1877.95) ; R8.2 3053.15,1852.36 v1(3055.12,1850.39)
  Solder Side w10: v1(1842.52,1877.95) 2212.6,1877.95 2232.28,1858.27 3047.24,1858.27 v1(3055.12,1850.39) I2C.2
I2C2_SDA: I2C.4 R7.2 U3.37 | length 1812.6
  Component Side w10: U3.37 1791.34,1881.89 v1(1811.02,1901.57) ; v1(3102.36,1893.7) R7.2
  Solder Side w10: v1(1811.02,1901.57) 2212.6,1901.57 2239.91,1874.27 2972.69,1874.27 2992.13,1893.7 v1(3102.36,1893.7) 3327.56,1893.7 I2C.4
JTAG_TCK: GPIO1.7 JTAG1.4 R22.1 U3.1 | length 1655.4
  Component Side w10: R22.1 v1(1899.61,3051.18) 2043.56,2907.23 2043.56,2289.62 2007.87,2253.94 U3.1 ; JTAG1.4 1900.39,3547.64 GPIO1.7
  Solder Side w10: v1(1899.61,3051.18) 1899.61,3316.93 1913.13,3330.46 1913.13,3409.2 1963.78,3459.84 GPIO1.7
JTAG_TDI: GPIO1.8 JTAG1.8 R23.1 U3.2 | length 1739.9
  Component Side w10: JTAG1.8 1800.39,3544.09 1811.02,3533.46 1811.02,3454.72 1830.71,3435.04 1912.99,3435.04 GPIO1.8 ; R23.1 v1(1899.61,3001.97) 2027.56,2874.02 2027.56,2312.99 1988.19,2273.62 U3.2
  Solder Side w10: v1(1899.61,3001.97) 1929.13,3031.5 1929.13,3349.61 GPIO1.8
JTAG_TDO: GPIO1.9 JTAG1.6 U3.3 | length 1561.5
  Component Side w10: JTAG1.6 1850.39,3543.31 1863.78,3529.92 GPIO1.9 ; v1(1917.32,2885.83) 1917.32,2795.28 2007.87,2704.72 2007.87,2332.68 1968.5,2293.31 U3.3
  Solder Side w10: GPIO1.9 1863.78,3481.89 1814.96,3433.07 1814.96,2988.19 v1(1917.32,2885.83)
JTAG_TMS: GPIO1.10 JTAG1.2 R21.1 U3.4 | length 1622
  Component Side w10: R21.1 v1(1889.76,2952.76) 1889.76,2795.28 1988.19,2696.85 1988.19,2352.36 1948.82,2312.99 U3.4
  Solder Side w10: v1(1889.76,2952.76) 1863.78,2978.74 GPIO1.10 1915.35,3435.83 1915.35,3519.69 1950.39,3554.72 JTAG1.2
LED1: L1.1 R18.1 | length 380.5
  Component Side w10: L1.1 590.55,787.4 629.92,748.03 R18.1
LED2: L2.1 R19.1 | length 977.2
  Component Side w10: L2.1 590.55,669.29 698.82,561.02 1102.36,561.02 1190.94,649.61 R19.1
LED3: L3.1 R20.1 | length 1417
  Component Side w10: L3.1 600.39,551.18 629.92,521.65 1535.43,521.65 1624.02,610.24 R20.1
NetC1_1: C1.1 R1.2 R2.1 | length 79
  Component Side w10: R2.1 C1.1 3169.92,1142.36 R1.2
NetC3_1: C3.1 R3.2 R4.1 | length 79
  Component Side w10: R4.1 3169.92,788.03 R3.2
NetC5_1: C5.1 U3.31 Y1.3 | length 530.1
  Component Side w10: C5.1 1482.28,1549.22 Y1.3 1473.43,1558.07 1437.01,1594.49 1437.01,1722.44 1564.96,1850.39 U3.31
NetC6_1: C6.1 U3.32 Y1.1 | length 260.6
  Component Side w10: Y1.1 1574.8,1632.87 C6.1 1574.8,1818.9 1586.61,1830.71 U3.32
NetC7_1: C7.1 U3.62 Y2.2 | length 458.9
  Component Side w10: U3.62 Y2.2 2470.47,2086.61 2490.16,2106.3 C7.1
NetC8_1: C8.1 U3.63 Y2.1 | length 394.8
  Component Side w10: U3.63 2185.04,2106.3 2263.78,2185.04 Y2.1 C8.1
NetC14_1: C14.1 C15.1 D4.K U6.3 | length 347.7
  Component Side w12: U6.3 575.2,3129.92 C14.1 C15.1 D4.K@916.72,3129.92
NetC17_2: C17.2 U5.3 | length 250.5
  Component Side w12: C17.2 344.49,2903.54 359.65,2888.39 U5.3
NetC32_1: C32.1 C33.1 U3.14 | length 273.5
  Component Side w10: C32.1 C33.1 1704.72,2322.83 1751.97,2275.59 U3.14
NetC32_2: C32.2 C33.2 U3.15 | length 288.2
  Component Side w10: C32.2 C33.2 1649.61,2401.46 1649.61,2346.46 1732.28,2263.78 U3.15
NetC34_2: C34.2 FB1.1 J3.1 R29.2 | length 451.8
  Component Side w12: J3.1 409.45,2480.31 479.69,2550.55 R29.2 574.17,2550.55 605.43,2581.81 C34.2 743.23,2581.81 FB1.1
NetC35_2: C35.2 U7.9 | length 116.3
  Component Side w10: C35.2 874.65,1425.2 905.51,1425.2 912.4,1418.31 U7.9
NetCAN1_1: CAN1.1 R1.1 U1.7 | length 837.2
  Component Side w10: U1.7 3076.18,1176.57 3080.71,1181.1 R1.1 3129.92,1220.47 3141.73,1232.28 v1(3157.48,1232.28)
  Solder Side w10: v1(3157.48,1232.28) 3358.27,1232.28 3437.01,1153.54 3437.01,925.2 3476.38,885.83 CAN1.1
NetCAN1_2: CAN1.2 R3.1 U2.7 | length 473.5
  Component Side w10: U2.7 3066.34,861.61 3070.87,866.14 R3.1 3129.92,889.76 3169.29,929.13 3340.94,929.13 CAN1.2
NetCAN1_3: CAN1.3 R2.2 U1.6 | length 597.5
  Component Side w10: U1.6 3046.65,1126.57 3070.87,1102.36 R2.2 3125.98,1099.06 3125.98,1066.93 3157.48,1035.43 3434.65,1035.43 CAN1.3
NetCAN1_4: CAN1.4 R4.2 U2.6 | length 635.7
  Component Side w10: U2.6 3036.81,811.61 3061.02,787.4 R4.2 3129.29,736.85 v1(3129.92,736.22)
  Solder Side w10: v1(3129.92,736.22) 3188.98,795.28 3188.98,893.7 3281.1,985.83 CAN1.4
NetD1_2: D1.2 R25.1 | length 71.3
  Component Side w12: D1.2 383.86,3194.88 389.76,3188.98 R25.1
NetJ1_2: J1.2 R14.2 | length 249
  Component Side w10: J1.2 428.74,1840.55 531.5,1840.55 541.34,1850.39 R14.2
NetJ1_3: J1.3 R12.2 | length 232
  Component Side w10: J1.3 531.1,1800.79 541.34,1811.02 R12.2
NetJ1_5: J1.5 R9.2 | length 252.8
  Component Side w10: J1.5 442.52,1712.6 531.5,1712.6 590.55,1653.54 R9.2
NetJ1_7: J1.7 R10.2 | length 233.3
  Component Side w10: J1.7 444.49,1624.02 531.5,1624.02 541.34,1614.17 R10.2
NetJ3_2: J3.2 R27.2 R30.1 | length 1224.4
  Component Side w12: J3.2 456.69,2448.82 468.5,2460.63 R30.1 559.06,2460.63 1027.56,1992.13 1351.73,1992.13 R27.2
NetJ3_3: J3.3 R28.2 R31.1 | length 1217.9
  Component Side w12: J3.3 452.76,2417.32 460.63,2409.45 515.75,2409.45 R31.1 559.06,2413.39 1015.75,1956.69 1355.67,1956.69 R28.2
NetJ3_4: J3.4 R32.2 | length 210.9
  Component Side w12: J3.4 413.39,2385.83 472.44,2326.77 516.38,2326.77 R32.2
NetLED1_K: LED1.K R18.2 | length 124
  Component Side w10: R18.2 856.3,748.03 872.05,732.28 LED1.K
NetLED2_K: LED2.K R19.2 | length 133
  Component Side w10: R19.2 1299.21,748.03 1309.06,738.19 1309.06,692.91 LED2.K
NetLED3_K: LED3.K R20.2 | length 127.3
  Component Side w10: R20.2 1722.44,748.03 1742.13,728.35 1742.13,692.91 LED3.K
NetR11_2: R11.2 U4.1 | length 153.8
  Component Side w10: R11.2 1524.96,1298.58 1582.68,1356.3 U4.1
NetR13_2: R13.2 U4.3 | length 205.5
  Component Side w10: R13.2 1446.85,1279.53 1466.54,1259.84 1525.59,1259.84 1547.25,1281.5 U4.3
NetR27_1: R27.1 U3.24 | length 248.2
  Component Side w12: R27.1 1450.79,1998.03 1460.63,1988.19 U3.24
NetR28_1: R28.1 U3.25 | length 249.8
  Component Side w12: R28.1 1399.61,1956.69 1448.82,1956.69 1460.63,1968.5 U3.25
PWM1_H: PWM1.3 U3.42 | length 1869.5
  Component Side w10: U3.42 1889.76,1603.32 2075.76,1417.32 v1(2114.17,1417.32)
  Solder Side w10: v1(2114.17,1417.32) 3114.17,1417.32 3165.35,1468.5 3435.43,1468.5 PWM1.3
PWM1_L: PWM1.1 U3.41 | length 1918
  Component Side w10: U3.41 1870.08,1600.37 2092.5,1377.95 v1(2129.92,1377.95)
  Solder Side w10: v1(2129.92,1377.95) 3114.17,1377.95 3157.48,1334.65 3401.57,1334.65 PWM1.1
PWM2_H: PWM1.4 U3.44 | length 1679.7
  Component Side w10: U3.44 1929.13,1609.2 2002.9,1535.43 v1(2015.75,1535.43) ; v1(2854.33,1578.74) 3322.83,1578.74 PWM1.4
  Solder Side w10: v1(2015.75,1535.43) 2811.02,1535.43 v1(2854.33,1578.74)
PWM2_L: PWM1.2 U3.43 | length 1729.5
  Component Side w10: U3.43 1909.45,1606.26 2015.71,1500 v1(2059.06,1500) ; v1(2854.33,1527.56) 3274.02,1527.56 PWM1.2
  Solder Side w10: v1(2059.06,1500) 2826.77,1500 v1(2854.33,1527.56)
RESET: JTAG1.10 R26.2 S4.2 U3.64 | length 2094.2
  Component Side w10: JTAG1.10 1677.17,3563.19 1677.17,3322.83 S4.2@2116.14,2883.86 ; U3.64 2125.98,2125.98 2155.51,2155.51 2155.51,2214.57 2115.51,2254.57 R26.2 2116.14,2776.22 S4.2@2116.14,2883.86 ; S4.2@2411.42,2883.86 S4.2@2116.14,2883.86
RXCAN0: U1.4 U3.45 | length 1178.6
  Component Side w10: U3.45 1948.82,1645.67 2517.91,1076.57 U1.4
RXCAN1: U2.4 U3.39 | length 1503.3
  Component Side w10: U3.39 1830.71,1594.49 2500,925.2 2500,846.46 2584.84,761.61 U2.4
SPI1_MISO: R10.1 U3.48 | length 1489.6
  Component Side w10: R10.1 v1(767.72,1614.17)
  Solder Side w10: v1(767.72,1614.17) 1948.82,1614.17 1992.13,1570.87 2062.99,1570.87 2118.11,1625.98 v1(2118.11,1665.35)
SPI1_MOSI: R12.1 U3.47 | length 1395.5
  Component Side w10: R12.1 v1(767.72,1811.02)
  Solder Side w10: v1(767.72,1811.02) 1173.23,1811.02 1240.16,1744.09 1909.45,1744.09 v1(2027.56,1625.98)
SPI1_NPCS: R14.1 U3.50 | length 1512.4
  Component Side w10: R14.1 v1(767.72,1850.39)
  Solder Side w10: v1(767.72,1850.39) 2165.35,1850.39 v1(2204.72,1811.02)
SPI1_SCK: R9.1 U3.49 | length 1661.9
  Component Side w10: R9.1 v1(830.71,1653.54)
  Solder Side w10: v1(830.71,1653.54) 1590.55,1653.54 1645.67,1708.66 1877.95,1708.66 1999.75,1586.87 2051.43,1586.87 2074.8,1610.24 2074.8,1681.1 v1(2175.2,1781.5)
TXCAN0: U1.1 U3.46 | length 1094.5
  Component Side w10: U3.46 1968.5,1649.61 2391.54,1226.57 U1.1
TXCAN1: U2.1 U3.40 | length 1373.7
  Component Side w10: U3.40 1850.39,1597.43 2536.21,911.61 U2.1
USART1_RXD: U3.59
USART1_TXD: U3.58 | length 0
USART2_RXD: U3.54
USART2_TXD: U3.53
VBUS: FB1.2 U3.23 U6.2 | length 2001.1
  Component Side w10: U6.2 551.18,3110.24 570.87,3090.55 594.49,3090.55 v1(618.11,3066.93) ; FB1.2 v1(818.9,2496.06) 818.9,2259.84 1039.37,2039.37 1433.07,2039.37 1460.36,2012.08 1460.78,2012.08 1464.99,2007.87 U3.23
  Solder Side w10: v1(618.11,3066.93) 618.11,2807.09 818.9,2606.3 v1(818.9,2496.06)
VDDCORE: C19.1 C20.1 U3.29 | length 385
  Component Side w10: C20.1 C19.1 1437.01,1751.97 1456.69,1771.65 1456.69,1830.71 1515.75,1889.76 U3.29
VIN: D4.A J2.1 | length 322.1
  Component Side w10: J2.1 866.14,3415.35 954.72,3326.77 D4.A
VMAIN: C16.2 U5.5 U5.7 U5.8 U6.6 | length 549.5
  Component Side w10: U6.6 v1(551.18,3228.35)
  Component Side w12: U5.5 673.43,2838.39 653.54,2858.27 653.54,2913.39 678.54,2938.39 U5.7 U5.8 744.41,2988.07 C16.2 944.76,2988.07 v2(944.88,2988.19)
pads on no net: D4.NC FB1.0 J1.1 J1.8 J3.X J3.Y JTAG1.7 LED1.0 LED2.0 LED3.0 S1.0 S2.0 S3.0 S4.0 U1.5 U2.5 U3.27 U3.55 U5.6 U6.7 U6.8 U7.1 U7.12 U7.13 U7.14 U7.21 U7.22 U7.23 U7.24

## Polygon pours and split planes (outlines as drawn)
GND on Ground Plane (split plane): 3765.3,3915.06 3789.94,3909.7 3813.56,3900.89 3835.69,3888.81 3855.87,3873.7 3873.7,3855.87 3888.81,3835.69 3900.89,3813.56 3909.7,3789.94 3915.06,3765.3 3916.91,3739.44 3916.91,197.57 3915.06,171.7 3909.7,147.07 3900.89,123.44 3888.81,101.32 3873.7,81.13 3855.87,63.31 3835.69,48.2 3813.56,36.12 3789.94,27.31 3765.31,21.95 3739.44,20.1 197.57,20.1 171.7,21.95 147.07,27.31 123.45,36.12 101.32,48.2 81.13,63.31 63.31,81.13 48.2,101.32 36.12,123.44 27.31,147.07 21.95,171.7 20.1,197.57 20.1,3739.44 21.95,3765.3 27.31,3789.94 36.12,3813.56 48.2,3835.69 63.31,3855.87 81.13,3873.7 101.32,3888.81 123.45,3900.89 147.07,3909.7 171.7,3915.06 197.57,3916.91 3739.44,3916.91
3V3 on Power Plane (split plane): 3765.3,3915.06 3789.94,3909.7 3813.56,3900.89 3835.69,3888.81 3855.87,3873.7 3873.7,3855.87 3888.81,3835.69 3900.89,3813.56 3909.7,3789.94 3915.06,3765.3 3916.91,3739.44 3916.91,197.57 3915.06,171.7 3909.7,147.07 3900.89,123.44 3888.81,101.32 3873.7,81.13 3855.87,63.31 3835.69,48.2 3813.56,36.12 3789.94,27.31 3765.31,21.95 3739.44,20.1 197.57,20.1 171.7,21.95 147.07,27.31 123.45,36.12 101.32,48.2 81.13,63.31 63.31,81.13 48.2,101.32 36.12,123.44 27.31,147.07 21.95,171.7 20.1,197.57 20.1,3739.44 21.95,3765.3 27.31,3789.94 36.12,3813.56 48.2,3835.69 63.31,3855.87 81.13,3873.7 101.32,3888.81 123.45,3900.89 147.07,3909.7 171.7,3915.06 197.57,3916.91 3739.44,3916.91
VMAIN on Power Plane (split plane): 605.14,3269.54 605.14,3236.22 605.14,3232.28 605.14,3145.67 605.53,3143.72 606.63,3142.06 681.43,3067.26 683.09,3066.16 685.04,3065.77 927.02,3065.77 987.03,3005.76 987.03,2828.88 930.96,2772.81 691.09,2772.81 642.89,2821.01 642.89,2984.25 642.51,2986.2 641.4,2987.86 590.22,3039.04 588.56,3040.14 586.61,3040.53 553.29,3040.53 473.6,3120.22 473.6,3257.73 509.99,3294.11 580.57,3294.11

## Other copper
Component Side:
  region net GND: 196.85,196.85 196.85,0 3740.16,0 3740.16,196.85
  region net GND: 3937.01,3740.16 3740.16,3740.16 3740.16,196.85 3937.01,196.85
  region net GND: 3740.16,3740.16 3740.16,3937.01 196.85,3937.01 196.85,3740.16
  rectangle net GND: 0,196.85 196.85,3740.16
Solder Side:
  region net GND: 196.85,196.85 196.85,0 3740.16,0 3740.16,196.85
  region net GND: 3937.01,3740.16 3740.16,3740.16 3740.16,196.85 3937.01,196.85
  region net GND: 3740.16,3740.16 3740.16,3937.01 196.85,3937.01 196.85,3740.16
  rectangle net GND: 0,196.85 196.85,3740.16
Power Plane (plane layer: these items are gaps in the copper):
  lines w10: 610.24,3232.28 610.24,3271.65 582.68,3299.21 507.87,3299.21 468.5,3259.84 468.5,3118.11 551.18,3035.43 586.61,3035.43 637.8,2984.25 637.8,2818.9 688.98,2767.72 933.07,2767.72 992.13,2826.77 992.13,3007.87 929.13,3070.87 685.04,3070.87 610.24,3145.67 610.24,3236.22

## Silkscreen, mask and mechanical layers (free items; w line width, h text height)
Top Overlay:
  lines w10: 1919.29,246.06 1919.29,639.76 3444.88,639.76 3444.88,246.06 1919.29,246.06
  text "EXTPWR" at 492.13,3671.26 h90 r270
  text "GPIO" at 2362.2,3671.26 h90 r180
  text "EXTINT" at 2805.12,3671.26 h90 r180
  text "RESET" at 2106.3,3110.24 h90
  text "I2C" at 3661.42,1781.5 h90 r90
  text "PWM" at 3661.42,1368.11 h90 r90
  text "BUT1" at 403.54,1112.2 h90
  text "BUT2" at 403.54,994.09 h90
  text "BUT3" at 403.54,875.98 h90
  text "CAN" at 3661.42,816.93 h90 r90
  text "LED1" at 393.7,728.35 h90
  text "LED2" at 393.7,610.24 h90
  text "UMSATS" at 2273.62,511.81 h120
  text "LED3" at 393.7,492.13 h90
  text "Sub-Systems Development Board" at 2086.61,324.8 h80
  text "Rev A1 04-Jun-15" at 2303.15,265.75 h60
Mechanical 1:
  the board outline again, w20

## Text inside footprints (layer, text, board x,y; h text height)
CAN1: Top Overlay "6" at 3404.25,1145.83 h20 r90; Top Overlay "5" at 3504.25,1145.83 h20 r90; Top Overlay "2" at 3404.25,785.83 h20 r90; Top Overlay "1" at 3504.25,805.83 h20 r90
EXTINT1: Top Overlay "6" at 2476.22,3404.25 h20 r180; Top Overlay "5" at 2476.22,3504.25 h20 r180; Top Overlay "2" at 2836.22,3404.25 h20 r180; Top Overlay "1" at 2816.22,3504.25 h20 r180
GPIO1: Top Overlay "12" at 1683.78,3404.25 h20 r180; Top Overlay "1" at 1643.78,3504.25 h20 r180; Top Overlay "1" at 1683.78,3504.25 h20 r180; Top Overlay "1" at 2363.78,3504.25 h20 r180; Top Overlay "2" at 2363.78,3404.25 h20 r180
I2C: Top Overlay "6" at 3404.25,2110.39 h20 r90; Top Overlay "5" at 3504.25,2110.39 h20 r90; Top Overlay "2" at 3404.25,1750.39 h20 r90; Top Overlay "1" at 3504.25,1770.39 h20 r90
PWM1: Top Overlay "6" at 3404.25,1677.32 h20 r90; Top Overlay "5" at 3504.25,1677.32 h20 r90; Top Overlay "2" at 3404.25,1317.32 h20 r90; Top Overlay "1" at 3504.25,1337.32 h20 r90